# Altium PCB SRP 70_50mm_Release_2022-03-04.pcbdoc
Units mm, origin at the board's own origin, x right, y up, seen from the top; angles counter-clockwise.
Board outline 179.34 x 114.59 mm, 2 copper layers (Top Layer, Bottom Layer); 37 components, 22 nets, 129 pads, 29 vias.
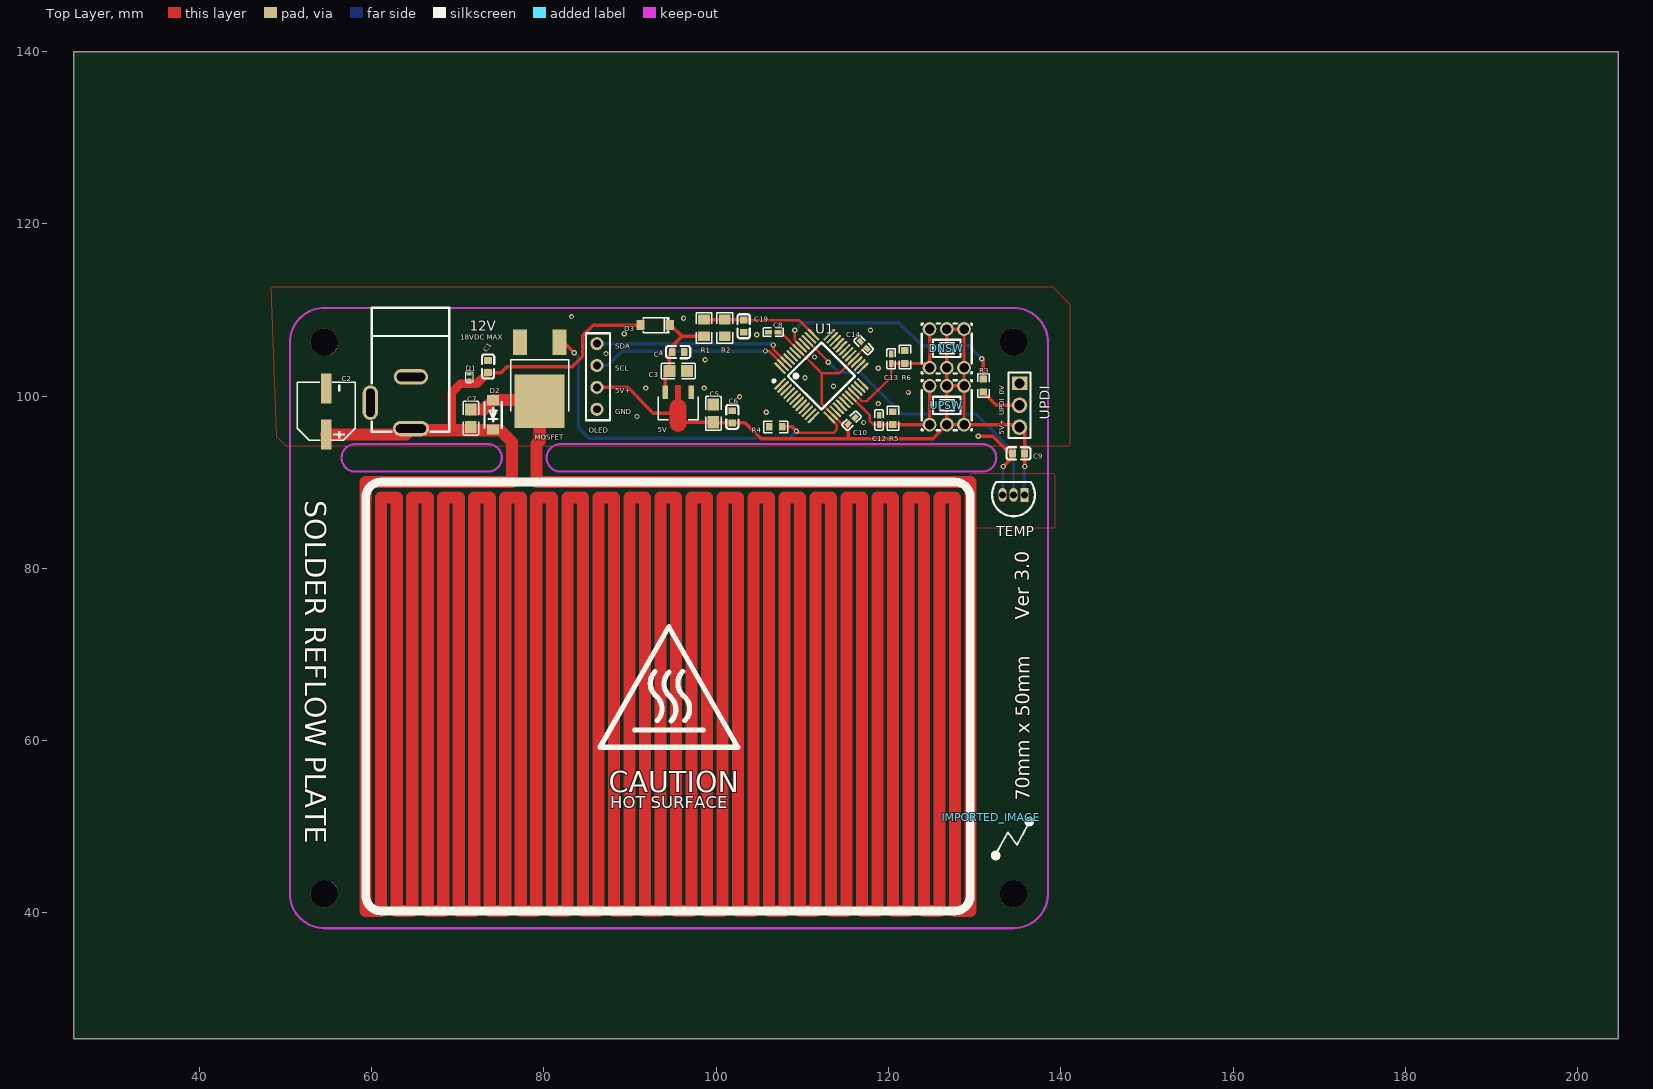
[diagram p0: Top Layer view]
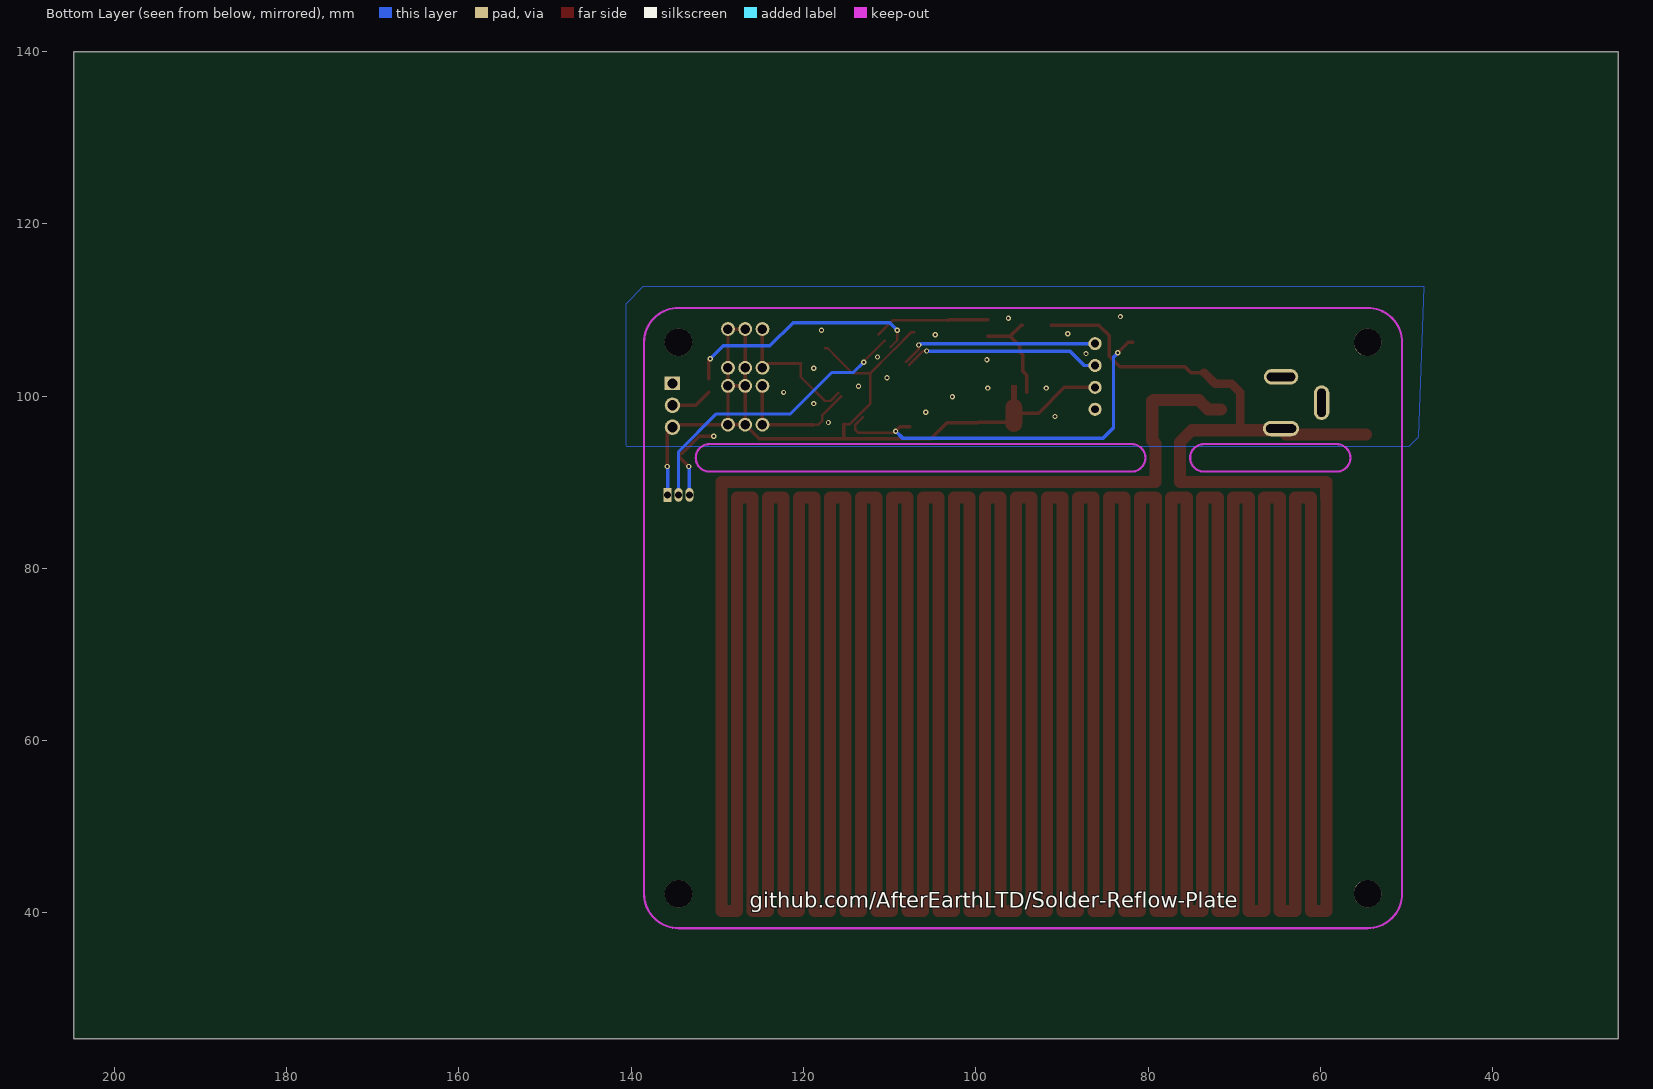
[diagram p1: Bottom Layer view, seen from below]

## Layer stack, top to bottom
Top Layer: signal copper (thickness not stored)
Dielectric: dielectric 0.32, FR-4, Dk 4.8
Bottom Layer: signal copper (thickness not stored)

## Board outline
204.744,25.4 25.4,25.4 25.4,139.993 204.744,139.993

## Components (designator, comment, footprint, x,y, rotation, side; value= is the part's Value field where it differs from the comment)
5V "AMS1117-5.0S" SOT-89_L4.5-W2.5-P1.50-LS4.2-BR 95.596,99.11 r90 top
12V "DC-005-5A-2.5" DC-IN-TH_DC-005-5A-2.5 62.217,99.227 r270 top
C1 "100nF" C0603 73.517,103.427 r270 top
C2 "100uF" CAP-SMD_BD6.3-L6.6-W6.6-LS7.6-FD 54.717,98.227 r90 top
C3 "22uF" C0805 95.596,102.91 r180 top
C4 "100nF" C0603 95.596,105.11 r0 top
C5 "22uF" C0805 99.676,97.992 r270 top
C6 "100nF" C0603 101.876,97.592 r90 top
C7 "1nF" C0805 71.517,97.427 r90 top
C8 "10nF" C0402 106.616,107.427 r0 top
C9 "100nF" C0603 135.099,93.345 r180 top
C10 "10nF" C0402 115.716,97.127 r225 top
C12 "10nF" C0402 118.917,97.227 r270 top
C13 "10nF" C0402 120.317,104.327 r270 top
C14 "10nF" C0402 117.116,105.927 r315 top
C19 "100nF" C0603 103.196,108.11 r90 top
D1 "PESDMC2FD18VB" SOD-882_L1.0-W0.6-BI 71.317,102.227 r270 top
D2 "MM1Z24" SOD-123_L2.8-W1.8-LS3.7-FD 74.117,97.827 r270 top
D3 "DSR1M_C908221" SOD-123_L2.8-W1.8-LS3.7-RD 92.917,108.227 r180 top
DNSW "K8-5851E-N1_C134191" SW-TH_6P-L5.8-W5.8-P2.00-LS4.5-BL 126.773,105.53 r180 top
IMPORTED_IMAGE "IMPORTED_IMAGE" IMPORTED_IMAGE 131.921,51.127 r0 top
MOSFET "UMW30N06" TO-252-2_L6.6-W6.1-P4.57-LS9.9-BR-CW 79.517,102.827 r90 top
OLED "OLED 0.91\"" OLED_0.91_128X32 83.617,108.627 r0 top
R1 "3K" R0805 98.596,107.91 r90 top
R2 "1K" R0805 100.996,107.91 r90 top
R3 "4.7K" R0603 131.016,101.227 r90 top
R4 "10K" R0603 106.916,96.427 r0 top
R5 "10K" R0603 120.516,97.427 r90 top
R6 "10K" R0603 121.916,104.527 r90 top
TEMP "LMT85LP" TO-92-3_L4.9-W3.7-P1.27-L 134.517,88.527 r180 top
U1 "ATMEGA4809-AFR" TQFP-48_L7.0-W7.0-P0.50-LS9.0-BL 112.216,102.327 r315 top
UPDI "Header-Male-2.54_1x3" HDR-TH_3P-P2.54-V-M-1 135.216,98.927 r270 top
UPSW "K8-5851E-N1_C134191" SW-TH_6P-L5.8-W5.8-P2.00-LS4.5-BL 126.773,98.928 r180 top
? "" ? 94.516,113.583 r0 top
? "" ? 49.357,74.227 r0 top
? "" ? 94.516,118.408 r0 top
? "" ? 44.334,74.227 r0 top

## Footprints (in the part's own frame and the unit in brackets; to place one, negate y for a bottom-side part, rotate by r counter-clockwise, add the part's x,y. Pads: shape width x height; smd on the part's side, far side on the other; paste and mask are expansions set on the pad)
C0402 [mm]
  rect 0.79x0.54 smd: 1(-0.545,0) 2(0.545,0)
  silkscreen extent -1.17,-0.5 1.17,0.5
C0603 [mm]
  rect 0.8x0.9 smd: 1(-0.7,0) 2(0.7,0)
  silkscreen extent -1.41,-0.71 1.39,0.72
C0805 [mm]
  rect 1.41x1.35 smd: 1(-1.03,0) 2(1.03,0)
  silkscreen extent -1.96,-0.9 1.96,0.9
CAP-SMD_BD6.3-L6.6-W6.6-LS7.6-FD [mm]
  rect 3.5x1.2 smd: 1(-2.67,0) 2(2.67,0)
  silkscreen extent -3.38,-3.38 3.38,3.38
DC-IN-TH_DC-005-5A-2.5 [mm]
  oval 1.8x4.2 hole 1 slot 3.5 at 90 deg: 1(3,2.352)
  oval 1.8x4 hole 1 slot 3.3 at 90 deg: 2(-3,2.352)
  oval 4x1.8 hole 1 slot 3.3 at 0 deg: 3(0,-2.352)
  silkscreen extent -11.03,-2.2 3.38,6.81
HDR-TH_3P-P2.54-V-M-1 [mm]
  rect 1.575x1.8 hole 1.2: 1(-2.54,0)
  round 1.8 hole 1.2: 2(0,0) 3(2.54,0)
  silkscreen extent -3.81,-1.27 3.81,1.27
IMPORTED_IMAGE [mm]
  silkscreen extent 0,-5 5,0
OLED_0.91_128X32 [mil]
  round 60 hole 36: 1(100,-100) 2(100,-200) 3(100,-300) 4(100,-400)
  silkscreen extent 50,-450 160,-52
R0603 [mm]
  rect 0.806x0.864 smd: 1(-0.753,0) 2(0.753,0)
  silkscreen extent -1.39,-0.66 1.39,0.66
R0805 [mm]
  rect 1.133x1.377 smd: 1(-0.966,0) 2(0.966,0)
  silkscreen extent -1.76,-0.92 1.76,0.92
SOD-123_L2.8-W1.8-LS3.7-FD [mm]
  rect 1.2x1.4 smd: 1(-1.7,0) 2(1.7,0)
  silkscreen extent -1.5,-1 1.5,1
SOD-123_L2.8-W1.8-LS3.7-RD [mm]
  rect 0.95x1.15 smd: 1(-1.693,0) 2(1.693,0)
  silkscreen extent -1.63,-0.94 1.41,0.94
SOD-882_L1.0-W0.6-BI [mm]
  rect 0.3x0.6 smd: 1(-0.325,0) 2(0.325,0)
  silkscreen extent -0.75,-0.4 0.75,0.4
SOT-89_L4.5-W2.5-P1.50-LS4.2-BR [mm]
  rect 1.575x0.672 smd: 1(1.356,-1.5) 3(1.356,1.5)
  round 0 smd: 2(-1.356,0.009)
  Top Layer region: -2.283,0.959 -0.429,0.959 -0.385,0.958 -0.34,0.955 -0.296,0.949 -0.252,0.942 -0.208,0.933 -0.165,0.921 -0.123,0.908 -0.081,0.893 -0.04,0.875 0,0.856 0.04,0.835 0.078,0.812 0.115,0.788 0.151,0.761 0.185,0.733 0.219,0.704 0.251,0.673 0.281,0.64 0.31,0.606 0.337,0.571 0.362,0.534 0.386,0.497 0.408,0.458 0.428,0.418 0.447,0.339 2.144,0.339 2.144,-0.321 0.447,-0.321 0.428,-0.401 0.408,-0.44 0.386,-0.479 0.362,-0.517 0.337,-0.553 0.31,-0.588 0.281,-0.622 0.251,-0.655 0.219,-0.686 0.185,-0.716 0.151,-0.744 0.115,-0.77 0.078,-0.795 0.04,-0.818 0,-0.839 -0.04,-0.858 -0.081,-0.875 -0.123,-0.89 -0.165,-0.904 -0.208,-0.915 -0.252,-0.925 -0.296,-0.932 -0.34,-0.937 -0.385,-0.94 -0.429,-0.941 -2.283,-0.941 -2.328,-0.94 -2.372,-0.937 -2.416,-0.932 -2.46,-0.925 -2.504,-0.915 -2.547,-0.904 -2.589,-0.89 -2.631,-0.875 -2.672,-0.858 -2.713,-0.839 -2.752,-0.818 -2.79,-0.795 -2.827,-0.77 -2.863,-0.744 -2.898,-0.716 -2.931,-0.686 -2.963,-0.655 -2.993,-0.622 -3.022,-0.588 -3.049,-0.553 -3.075,-0.517 -3.098,-0.479 -3.12,-0.44 -3.141,-0.401 -3.159,-0.36 -3.175,-0.318 -3.189,-0.276 -3.202,-0.233 -3.212,-0.19 -3.22,-0.146 -3.227,-0.102 -3.231,-0.058 -3.233,-0.013 -3.233,0.031 -3.231,0.076 -3.227,0.12 -3.22,0.164 -3.212,0.208 -3.202,0.251 -3.189,0.294 -3.175,0.336 -3.159,0.377 -3.141,0.418 -3.12,0.458 -3.098,0.497 -3.075,0.534 -3.049,0.571 -3.022,0.606 -2.993,0.64 -2.963,0.673 -2.931,0.704 -2.898,0.733 -2.863,0.761 -2.827,0.788 -2.79,0.812 -2.752,0.835 -2.713,0.856 -2.672,0.875 -2.631,0.893 -2.589,0.908 -2.547,0.921 -2.504,0.933 -2.46,0.942 -2.416,0.949 -2.372,0.955 -2.328,0.958
  silkscreen extent -1.87,-2.33 0.78,2.33
SW-TH_6P-L5.8-W5.8-P2.00-LS4.5-BL [mm]
  round 1.6 hole 1.1: 1(-2,-2.25) 2(0,-2.25) 3(2,-2.25) 4(-2,2.25) 5(0,2.25) 6(2,2.25)
  silkscreen extent -2.9,-2.9 2.9,2.9
TO-92-3_L4.9-W3.7-P1.27-L [mm]
  rect 0.9x1.6 hole 0.8: 1(-1.27,0)
  oval 0.9x1.6 hole 0.8: 2(0,0) 3(1.27,0)
  silkscreen extent -2.48,-1.5 2.48,2.48
TO-252-2_L6.6-W6.1-P4.57-LS9.9-BR-CW [mm]
  rect 3x1.6 smd: 1(3.424,-2.29) 3(3.424,2.29)
  rect 6.2x5.8 smd: 2(-3.424,0)
  silkscreen extent -4.58,-3.35 1.38,3.35
TQFP-48_L7.0-W7.0-P0.50-LS9.0-BL [mm]
  oval 0.28x1.8 smd: 1(-2.75,-4.05) 2(-2.25,-4.05) 3(-1.75,-4.05) 4(-1.25,-4.05) 5(-0.75,-4.05) 6(-0.25,-4.05) 7(0.25,-4.05) 8(0.75,-4.05) 9(1.25,-4.05) 10(1.75,-4.05) 11(2.25,-4.05) 12(2.75,-4.05) 25(2.75,4.05) 26(2.25,4.05) 27(1.75,4.05) 28(1.25,4.05) 29(0.75,4.05) 30(0.25,4.05) 31(-0.25,4.05) 32(-0.75,4.05) 33(-1.25,4.05) 34(-1.75,4.05) 35(-2.25,4.05) 36(-2.75,4.05)
  oval 1.8x0.28 smd: 13(4.05,-2.75) 14(4.05,-2.25) 15(4.05,-1.75) 16(4.05,-1.25) 17(4.05,-0.75) 18(4.05,-0.25) 19(4.05,0.25) 20(4.05,0.75) 21(4.05,1.25) 22(4.05,1.75) 23(4.05,2.25) 24(4.05,2.75) 37(-4.05,2.75) 38(-4.05,2.25) 39(-4.05,1.75) 40(-4.05,1.25) 41(-4.05,0.75) 42(-4.05,0.25) 43(-4.05,-0.25) 44(-4.05,-0.75) 45(-4.05,-1.25) 46(-4.05,-1.75) 47(-4.05,-2.25) 48(-4.05,-2.75)
  silkscreen extent -3.65,-4.45 2.75,2.75
? [mm]

## Free pads (board coordinates)
  round 3.2 hole 3.2 unplated: ""(54.517,42.227) ""(54.517,106.227) ""(134.517,42.227) ""(134.517,106.227)

## Via types
v1: diameter 0.61, hole 0.305, Top Layer to Bottom Layer, tented both sides, 29 vias

## Nets (pads, with @x,y where several pads share a name; then routed paths per layer and width w, separated by ;. In a path a pad name is that pad's centre, name@x,y a point inside that pad or via, vN(x,y) a via of type N, cw(c..) or ccw(c..) an arc to the next point about the centre after c; other vN are vias at no path point)
0V: 5V.1 12V.2 12V.3 C1.1 C2.2 C3.1 C4.2 C5.1 C6.2 C8.1 C9.2 C10.1 C12.1 C13.1 C14.1 C19.1 D1.1 MOSFET.3 OLED.4 R2.1 R4.1 R5.2 R6.2 TEMP.3 U1.15 U1.29 U1.43 UPDI.1 | length 10.1
  Top Layer w0.4: v1(130.417,95.327) 132.117,95.327 134.099,93.345 C9.2 134.399,92.909 v1(133.317,91.827)
  Bottom Layer w0.4: TEMP.3 133.247,91.757 v1(133.317,91.827)
  other v1: 117.116,96.927 90.816,97.627 105.816,98.127 118.816,99.127 102.717,99.927 122.317,100.427 91.817,100.927 98.617,100.927 113.617,101.127 110.317,102.127 118.816,103.227 98.717,104.227 111.416,104.527 87.217,104.927 104.717,107.103 89.317,107.227 117.917,107.627 96.217,109.027 83.217,109.227
5V+: 5V.2 C5.2 C6.1 C8.2 C9.1 C10.2 C14.2 DNSW.1 DNSW.2 DNSW.4 DNSW.5 OLED.3 TEMP.1 U1.14 U1.28 U1.42 UPDI.3 UPSW.1 UPSW.2 UPSW.4 UPSW.5 | length 109.5
  Top Layer w0.28: C8.2@107.161,107.427 107.461,107.427 U1.42@109.528,105.359 ; U1.42 112.27,102.627 ; C10.2 114.62,96.741 U1.14 112.27,99.091 112.27,102.627 ; C14.2 117.199,105.541 U1.28 114.284,102.627 112.27,102.627
  Top Layer w0.4: OLED.3 89.736,101.007 92.717,98.027 95.314,98.027 5V.2 96.379,96.962 C5.2 99.746,96.892 101.875,96.892 103.346,96.892 ; 103.346,96.891 105.21,95.026 125.121,95.026 UPSW.5@126.772,96.677 ; 115.331,95.026 C10.2 ; UPSW.2@126.772,101.178 UPSW.1@128.771,101.178 ; UPSW.4 134.925,96.678 UPDI.3 135.799,95.805 C9.1 135.799,91.845 v1(135.817,91.827) ; UPSW.5@126.772,96.678 126.772,107.778 128.771,107.778 128.771,96.678 UPSW.5@126.772,96.678
  Bottom Layer w0.4: TEMP.1 135.787,91.797 v1(135.817,91.827)
DNSW: C13.2 DNSW.3 DNSW.6 R6.1 U1.21 | length 16.6
  Top Layer w0.28: U1.21 116.884,99.427 117.516,99.427 120.317,102.228 C13.2
  Top Layer w0.4: C13.2 124.271,103.782 DNSW.6 ; DNSW.6 DNSW.3@124.772,107.778
GATE: MOSFET.1 R4.2 U1.13 | length 45.8
  Top Layer w0.28: v1(109.317,95.927) 109.516,95.728 113.618,95.728 114.017,96.126 114.017,96.637 U1.13@113.135,97.518
  Top Layer w0.4: MOSFET.1 82.293,106.251 v1(83.517,105.027) ; R4.2 108.816,96.427 v1(109.317,95.927)
  Bottom Layer w0.4: v1(83.517,105.027) 84.017,104.527 84.017,96.327 85.217,95.127 108.516,95.127 v1(109.317,95.927)
NULL: 
S$2640: 
S$2645: 
S$2657: 
S$2663: 
S$2689: 
S$2691: 
S$2693: 
S$2739: 
SCKOLED: OLED.2 U1.47 | length 23
  Top Layer w0.28: v1(105.716,105.227) 106.135,105.227 U1.47
  Bottom Layer w0.4: OLED.2 87.437,103.547 89.117,105.227 105.216,105.227 ; 105.216,105.227 v1(105.716,105.227)
SDAOLED: OLED.1 U1.46 | length 23.1
  Top Layer w0.28: v1@106.616,105.927 106.616,105.452 U1.46
  Bottom Layer w0.4: OLED.1 106.456,106.087 v1(106.617,105.927)
TEMPDATA: TEMP.2 U1.39 | length 34.3
  Top Layer w0.28: U1.39 113.016,104.003 v1@113.016,103.927
  Bottom Layer w0.36: v1(113.017,103.927) 114.216,102.728 116.717,102.728 121.517,97.927 130.118,97.927 134.517,93.523 TEMP.2@134.517,88.519
UPDI: R3.2 U1.41 | length 28.5
  Top Layer w0.28: v1(109.116,107.627) 109.117,106.487 U1.41
  Top Layer w0.4: v1(130.816,104.327) 131.016,104.127 R3.2
  Bottom Layer w0.4: v1(109.116,107.627) 110.016,108.527 121.217,108.527 123.918,105.827 129.318,105.827 v1@130.816,104.328
UPDI_2: R3.1 UPDI.2 | length 4.9
  Top Layer w0.4: R3.1 131.016,100.427 132.516,98.927 UPDI.2
UPSW: C12.2 R5.1 U1.20 UPSW.3 UPSW.6 | length 15.5
  Top Layer w0.28: U1.20 117.816,97.788 117.816,97.127 118.261,96.682 C12.2
  Top Layer w0.4: C12.2@118.917,96.624 C12.2 120.517,96.674 124.769,96.674 UPSW.6 ; UPSW.6 UPSW.3
VCC: 12V.1 C1.2 C2.1 C7.1 C7.2 D1.2 D2.1 D2.2 D3.2 MOSFET.2 | length 2137.2
  Top Layer w0.4: C1.2@73.516,102.728 75.017,102.728 75.716,103.426 83.316,103.426 84.517,104.628 84.517,107.028 85.716,108.227 D3.2
  Top Layer w1: 69.317,96.027 69.317,100.427 70.317,101.427 72.217,101.427 C1.2
  Top Layer w1.4: C2.1 63.998,95.557 12V.1@64.468,96.027 ; 59.317,88.227 59.317,40.227 61.117,40.227 61.117,88.227 62.917,88.227 62.917,40.227 64.717,40.227 64.717,88.227 66.517,88.227 66.517,40.227 68.317,40.227 68.317,88.227 70.117,88.227 70.117,40.227 71.917,40.227 71.917,88.227 73.717,88.227 73.717,40.227 75.517,40.227 75.517,88.227 77.317,88.227 77.317,40.227 79.117,40.227 79.117,88.227 80.917,88.227 80.917,40.227 82.717,40.227 82.717,88.227 84.517,88.227 84.517,40.227 86.317,40.227 86.317,88.227 88.117,88.227 88.117,40.227 89.917,40.227 89.917,88.227 91.717,88.227 91.717,40.227 93.517,40.227 93.517,88.227 95.317,88.227 95.317,40.227 97.117,40.227 97.117,88.227 98.917,88.227 98.917,40.227 100.717,40.227 100.717,88.227 102.517,88.227 102.517,40.227 104.317,40.227 104.317,88.227 106.117,88.227 106.117,40.227 107.917,40.227 107.917,88.227 109.717,88.227 109.717,40.227 111.517,40.227 111.517,88.227 113.317,88.227 113.317,40.227 115.117,40.227 115.117,88.227 116.917,88.227 116.917,40.227 118.717,40.227 118.717,88.227 120.517,88.227 120.517,40.227 122.317,40.227 122.317,88.227 124.117,88.227 124.117,40.227 125.917,40.227 125.917,88.227 127.717,88.227 127.717,40.227 129.517,40.227 129.517,88.227 ; 59.318,88.227 59.318,90.028 76.315,90.028 76.315,94.628 74.916,96.027 12V.1@64.469,96.027 ; C7.2 73.046,98.457 D2.1 ; D2.1 79.393,99.527 MOSFET.2 79.517,94.827 79.117,94.428 79.117,90.027 129.516,90.027 129.516,88.228
VCCDIV: C19.2 R1.2 R2.2 U1.37 | length 13.4
  Top Layer w0.28: C19.2 109.623,108.81 U1.37
  Top Layer w0.4: R1.2 103.13,108.876 C19.2
VIN-D: 5V.3 C3.2 C4.1 D3.1 R1.1 | length 11.8
  Top Layer w0.4: 5V.3 94.096,102.439 C3.2 94.566,104.78 C4.1 94.896,105.806 96.033,106.943 ; D3.1 94.749,108.227 96.033,106.943 ; R1.1 96.033,106.943
pads on no net: U1.1 U1.2 U1.3 U1.4 U1.5 U1.6 U1.7 U1.8 U1.9 U1.10 U1.11 U1.12 U1.16 U1.17 U1.18 U1.19 U1.22 U1.23 U1.24 U1.25 U1.26 U1.27 U1.30 U1.31 U1.32 U1.33 U1.34 U1.35 U1.36 U1.38 U1.40 U1.44 U1.45 U1.48

## Polygon pours and split planes (outlines as drawn)
0V on Bottom Layer (solid): 47.966,112.677 138.667,112.677 140.667,110.677 140.667,94.277 140.567,94.177 49.666,94.177 48.566,95.277
VCC on Top Layer (solid): 129.717,91.027 139.117,91.027 139.317,90.827 139.317,89.827 139.317,85.827 139.316,84.627 129.816,84.627 129.317,90.627
0V on Top Layer (solid): 48.366,112.677 139.067,112.677 141.067,110.677 141.067,94.277 140.967,94.177 50.066,94.177 48.966,95.277

## Keep-outs
Keep-Out Layer:
  lines w0.254: 50.517,42.227 ccw(c54.517,42.227) 54.517,38.227 ; 50.517,106.227 cw(c54.517,106.227) 54.517,110.227 ; 134.517,38.227 ccw(c134.517,42.227) 138.517,42.227 ; 134.517,110.227 cw(c134.517,106.227) 138.517,106.227
  lines w0.254 net VCC: 58.117,91.227 cw(c58.117,92.827) 56.517,92.827 cw(c58.117,92.827) 58.117,94.427 ; 73.517,91.227 ccw(c73.517,92.827) 75.117,92.827 ccw(c73.517,92.827) 73.517,94.427 ; 81.917,91.227 cw(c81.917,92.827) 80.317,92.827 cw(c81.917,92.827) 81.917,94.427 ; 130.917,91.227 ccw(c130.917,92.827) 132.517,92.827 ccw(c130.917,92.827) 130.917,94.427

## Silkscreen, mask and mechanical layers (free items; w line width, h text height)
Top Overlay:
  lines w0.6 net S$2689: 86.517,59.227 102.517,59.227
  lines w0.6 net S$2691: 86.517,59.227 94.517,73.227 102.517,59.227
  lines w0.6 net S$2693: 90.517,61.227 98.517,61.227
  lines w0.6 net S$2739: 92.917,68.027 ccw(c94.282,66.661) 92.351,66.661 ccw(c94.282,66.661) 92.917,65.296 93.151,65.061 cw(c91.785,63.696) 93.717,63.696 cw(c91.785,63.696) 93.151,62.33 ; 94.517,65.227 94.751,64.993 cw(c93.385,63.627) 95.317,63.627 cw(c93.385,63.627) 94.751,62.261 ; 94.517,65.227 cw(c95.882,66.593) 93.951,66.593 cw(c95.882,66.593) 94.517,67.958 ; 96.117,68.027 ccw(c97.482,66.661) 95.551,66.661 ccw(c97.482,66.661) 96.117,65.296 96.351,65.061 cw(c94.985,63.696) 96.917,63.696 cw(c94.985,63.696) 96.351,62.33
  lines w1 net S$2640: 61.117,40.227 127.717,40.227
  lines w1 net S$2645: 61.117,90.027 127.717,90.027
  lines w1 net S$2657: 61.117,40.227 cw(c61.117,42.027) 59.317,42.027 59.317,88.227 cw(c61.117,88.227) 61.117,90.027
  lines w1 net S$2663: 127.717,40.227 ccw(c127.717,42.027) 129.517,42.027 129.517,88.227 ccw(c127.717,88.227) 127.717,90.027
  text "18VDC MAX" at 70.317,106.527 h0.6
  text "5V+  UPDI  0V" at 133.416,95.527 h0.6 r90
  text "SOLDER REFLOW PLATE" at 52.272,87.888 h2.4 r270
  text "Ver 3.0" at 136.316,74.027 h1.6 r90
  text "CAUTION" at 87.517,54.027 h2.4
  text "70mm x 50mm" at 136.416,53.027 h1.6 r90
  text "HOT SURFACE" at 87.717,52.127 h1.4
Bottom Overlay:
  text "github.com/AfterEarthLTD/Solder-Reflow-Plate" at 126.217,40.627 h1.8
Document:
  lines w0.254: 142.517,102.027 191.917,102.027 191.917,110.127 142.517,110.127 142.517,102.027
  text "Switch Notch is on NO side." at 143.227,106.045 h2.03
  text "Notch should point towards LCD." at 143.217,102.611 h2.03

## Text inside footprints (layer, text, board x,y; h text height)
OLED: Document "OLED 128x32 0.91\"" at 97.841,101.471 h1.5; Top Overlay "5V+" at 88.3,100.319 h0.6; Top Overlay "GND" at 88.3,97.899 h0.6; Top Overlay "SCL" at 88.3,102.919 h0.6; Top Overlay "SDA" at 88.3,105.519 h0.6